# EAGLE board CPC_FOURROM_V1.00 (EAGLE 6.4)
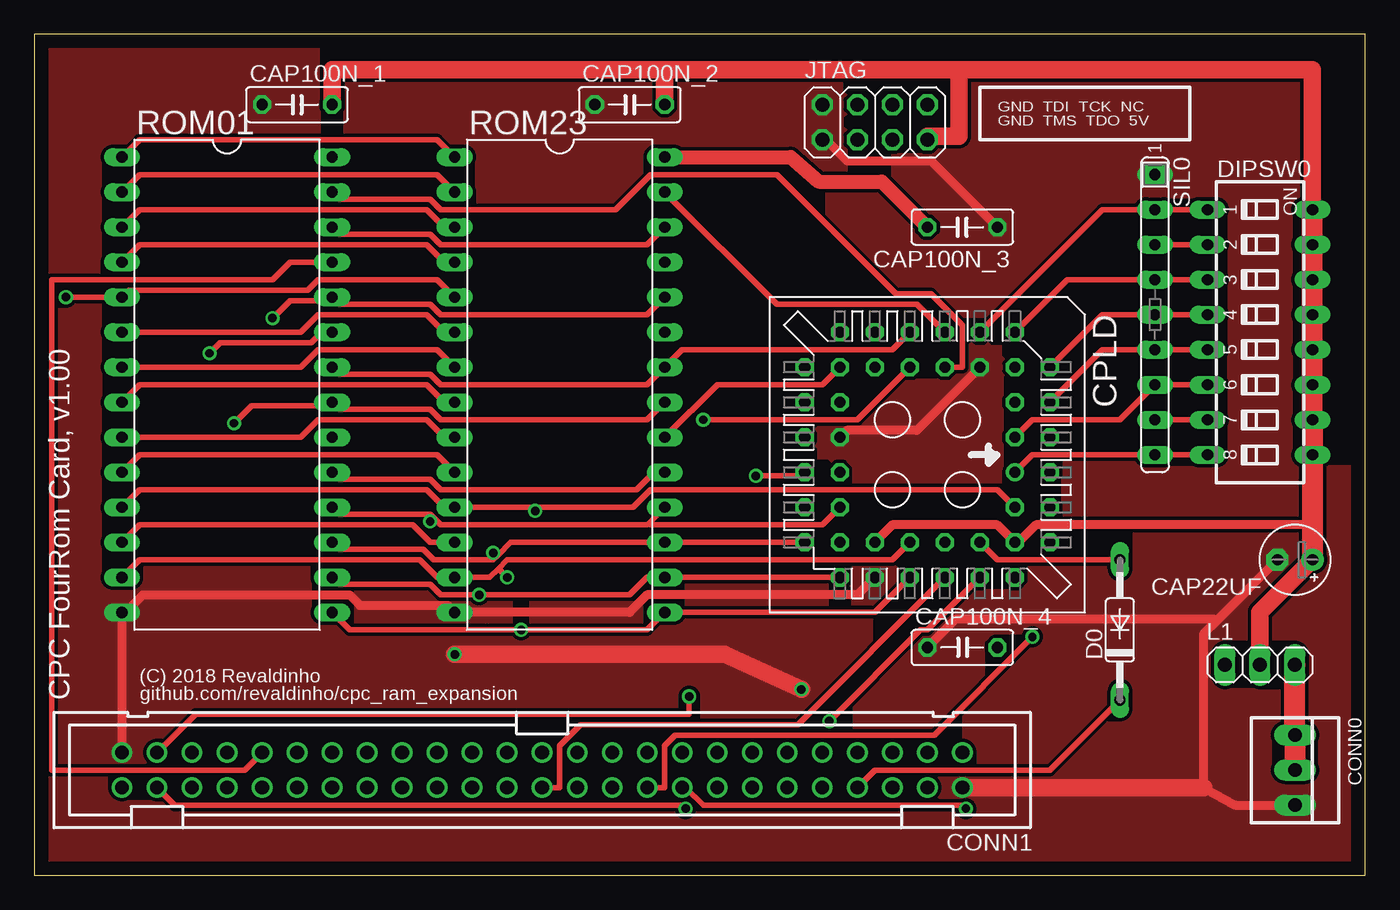
[diagram p0: board, top side]
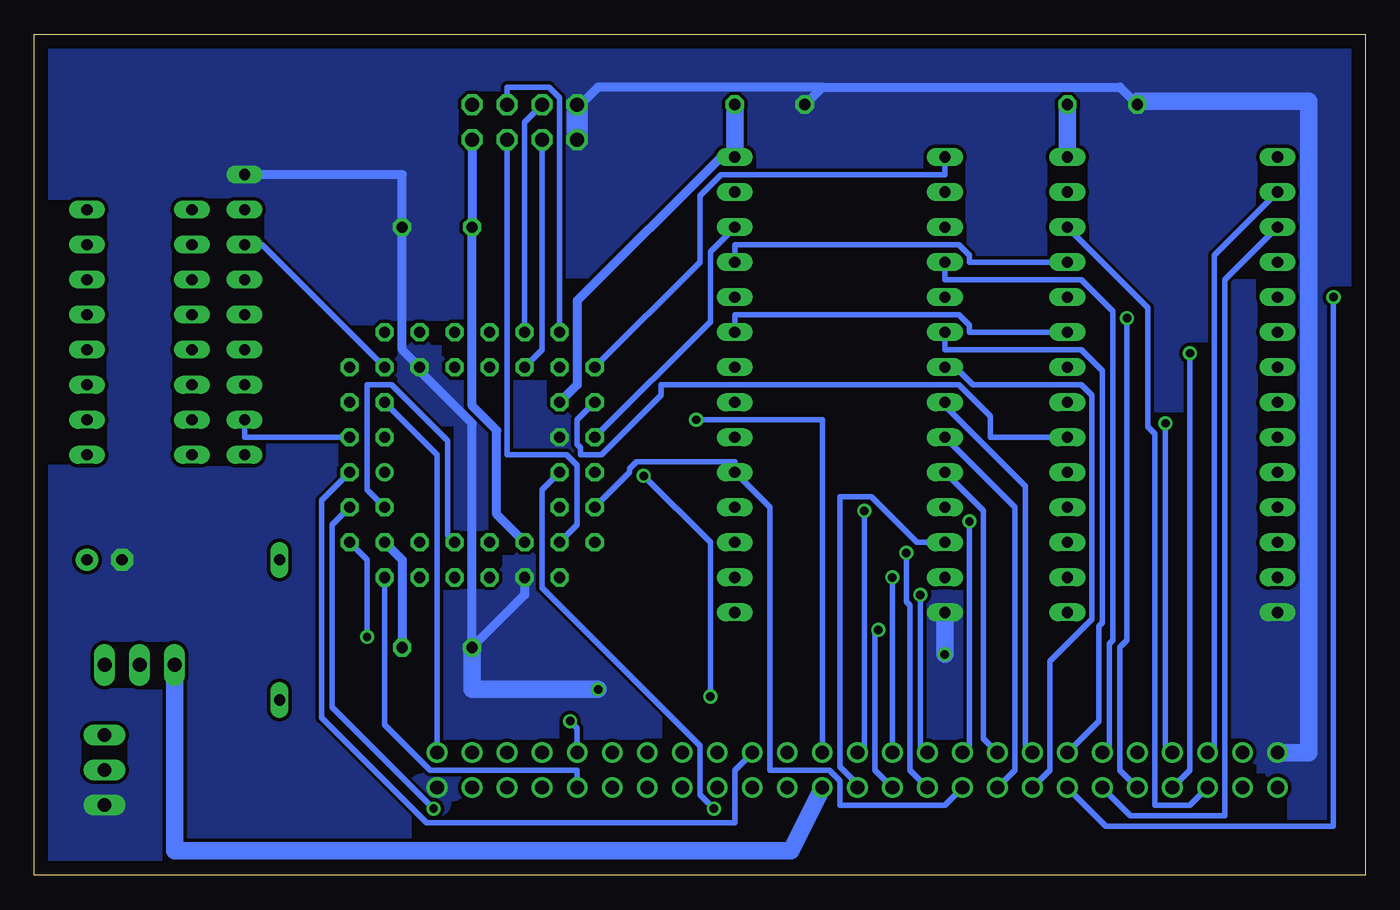
[diagram p1: board, bottom side, seen from below]

Size 96.52 x 60.96 mm. Coordinates in mm from the lower left corner, seen from the top.
Outline: 0,0 96.52,0 96.52,60.96 0,60.96 0,0
Copper layers (1*16): Top 0.035mm / dielectric 1.5mm / Bottom 0.035mm
Design rules "default": minimum track width 10mil, minimum drill 24mil, track to track 8mil, track to pad 8mil, pad to pad 8mil, via to via 8mil, smd to smd 8mil, copper to edge 40mil, drill to drill 8mil, minimum pad ring 10mil, minimum via ring 8mil, stop-mask expansion 4mil, vias tented up to drill 0mil, thermal gap 10mil
Net classes: 0 signal: width 0.381 mm, clearance 0.254 mm; 1 supply: width 0.635 mm, clearance 0.254 mm

## Footprints (pad centres in the part's own frame; a part is rotated, then mirrored left to right if it is on the bottom)
E2,5-5 = drill 0.813 pad 1.6: + -1.27,0 | drill 0.813 pad 1.6 octagon: - 1.27,0
C050-025X075 = drill 0.813 octagon: 1 -2.54,0; 2 2.54,0
22-23-2031 = drill 1 long: 1 -2.54,0; 2 0,0; 3 2.54,0
PAK100/2500-50 = drill 1 pad 1.422: 1 -30.48,-1.27; 2 -30.48,1.27; 3 -27.94,-1.27; 4 -27.94,1.27; 5 -25.4,-1.27; 6 -25.4,1.27; 7 -22.86,-1.27; 8 -22.86,1.27; 9 -20.32,-1.27; 10 -20.32,1.27; 11 -17.78,-1.27; 12 -17.78,1.27; 13 -15.24,-1.27; 14 -15.24,1.27; 15 -12.7,-1.27; 16 -12.7,1.27; 17 -10.16,-1.27; 18 -10.16,1.27; 19 -7.62,-1.27; 20 -7.62,1.27; 21 -5.08,-1.27; 22 -5.08,1.27; 23 -2.54,-1.27; 24 -2.54,1.27; 25 0,-1.27; 26 0,1.27; 27 2.54,-1.27; 28 2.54,1.27; 29 5.08,-1.27; 30 5.08,1.27; 31 7.62,-1.27; 32 7.62,1.27; 33 10.16,-1.27; 34 10.16,1.27; 35 12.7,-1.27; 36 12.7,1.27; 37 15.24,-1.27; 38 15.24,1.27; 39 17.78,-1.27; 40 17.78,1.27; 41 20.32,-1.27; 42 20.32,1.27; 43 22.86,-1.27; 44 22.86,1.27; 45 25.4,-1.27; 46 25.4,1.27; 47 27.94,-1.27; 48 27.94,1.27; 49 30.48,-1.27; 50 30.48,1.27
PLCC-S44-SOCKET = drill 0.813: 1 1.27,6.35 | drill 0.813 octagon: 2 -1.27,8.89; 3 -1.27,6.35; 4 -3.81,8.89; 5 -3.81,6.35; 6 -6.35,8.89; 7 -8.89,6.35; 8 -6.35,6.35; 9 -8.89,3.81; 10 -6.35,3.81; 11 -8.89,1.27; 12 -6.35,1.27; 13 -8.89,-1.27; 14 -6.35,-1.27; 15 -8.89,-3.81; 16 -6.35,-3.81; 17 -8.89,-6.35; 18 -6.35,-8.89; 19 -6.35,-6.35; 20 -3.81,-8.89; 21 -3.81,-6.35; 22 -1.27,-8.89; 23 -1.27,-6.35; 24 1.27,-8.89; 25 1.27,-6.35; 26 3.81,-8.89; 27 3.81,-6.35; 28 6.35,-8.89; 29 8.89,-6.35; 30 6.35,-6.35; 31 8.89,-3.81; 32 6.35,-3.81; 33 8.89,-1.27; 34 6.35,-1.27; 35 8.89,1.27; 36 6.35,1.27; 37 8.89,3.81; 38 6.35,3.81; 39 8.89,6.35; 40 6.35,8.89; 41 6.35,6.35; 42 3.81,8.89; 43 3.81,6.35; 44 1.27,8.89
DO35-10 = drill 0.813 long: A 5.08,0; C -5.08,0
SD4-08 = drill 0.813 long: 1 -8.89,-3.81; 2 -6.35,-3.81; 3 -3.81,-3.81; 4 -1.27,-3.81; 5 1.27,-3.81; 6 3.81,-3.81; 7 6.35,-3.81; 8 8.89,-3.81; 9 8.89,3.81; 10 6.35,3.81; 11 3.81,3.81; 12 1.27,3.81; 13 -1.27,3.81; 14 -3.81,3.81; 15 -6.35,3.81; 16 -8.89,3.81
2X04 = drill 1.016 octagon: 1 -3.81,-1.27; 2 -3.81,1.27; 3 -1.27,-1.27; 4 -1.27,1.27; 5 1.27,-1.27; 6 1.27,1.27; 7 3.81,-1.27; 8 3.81,1.27
1X03 = drill 1.016 long: 1 -2.54,0; 2 0,0; 3 2.54,0
DIL28 = drill 0.813 long: 1 -16.51,-7.62; 2 -13.97,-7.62; 3 -11.43,-7.62; 4 -8.89,-7.62; 5 -6.35,-7.62; 6 -3.81,-7.62; 7 -1.27,-7.62; 8 1.27,-7.62; 9 3.81,-7.62; 10 6.35,-7.62; 11 8.89,-7.62; 12 11.43,-7.62; 13 13.97,-7.62; 14 16.51,-7.62; 15 16.51,7.62; 16 13.97,7.62; 17 11.43,7.62; 18 8.89,7.62; 19 6.35,7.62; 20 3.81,7.62; 21 1.27,7.62; 22 -1.27,7.62; 23 -3.81,7.62; 24 -6.35,7.62; 25 -8.89,7.62; 26 -11.43,7.62; 27 -13.97,7.62; 28 -16.51,7.62
SIL9 = drill 0.813 long: 1 -10.16,0; 2 -7.62,0; 3 -5.08,0; 4 -2.54,0; 5 0,0; 6 2.54,0; 7 5.08,0; 8 7.62,0; 9 10.16,0

## Placement (x,y rotation side)
CAP22UF  [E2,5-5]  91.44,22.86 180 top
CAP100N_1  [C050-025X075]  19.05,55.88 0 top
CAP100N_2  [C050-025X075]  43.18,55.88 0 top
CAP100N_3  [C050-025X075]  67.31,46.99 180 top
CAP100N_4  [C050-025X075]  67.31,16.51 0 top
CONN0  [22-23-2031]  91.44,7.62 270 top
CONN1  [PAK100/2500-50]  36.83,7.62 180 top
CPLD  [PLCC-S44-SOCKET]  64.77,30.48 270 top
D0  [DO35-10]  78.74,17.78 90 top
DIPSW0  [SD4-08]  88.9,39.37 270 top
JTAG  [2X04]  60.96,54.61 0 top
L1  [1X03]  88.9,15.24 0 top
ROM01  [DIL28]  13.97,35.56 270 top
ROM23  [DIL28]  38.1,35.56 270 top
SIL0  [SIL9]  81.28,40.64 270 top

## Library data of the parts
CAP22UF CAP100N_1-CAP100N_4 = resistor
CONN0 = con-molex
CONN1 = con-3m
CPLD ROM01 ROM23 = ic-package
D0 = diode
DIPSW0 = switch-dil
JTAG L1 = pinhead
SIL0 = resistor-sil

## Nets
A0: CONN1.33 ROM01.10 ROM23.10
A1: CONN1.34 ROM01.9 ROM23.9
A2: CONN1.35 ROM01.8 ROM23.8
A3: CONN1.36 ROM01.7 ROM23.7
A4: CONN1.37 ROM01.6 ROM23.6
A5: CONN1.38 ROM01.5 ROM23.5
A6: CONN1.39 ROM01.4 ROM23.4
A7: CONN1.40 ROM01.3 ROM23.3
A8: CONN1.41 ROM01.25 ROM23.25
A9: CONN1.42 ROM01.24 ROM23.24
A10: CONN1.43 ROM01.21 ROM23.21
A11: CONN1.44 ROM01.23 ROM23.23
A12: CONN1.45 ROM01.2 ROM23.2
A13: CONN1.46 CPLD.22 ROM01.26 ROM23.26
A14: CONN1.47 CPLD.24
A15: CONN1.48 CPLD.25
BUSACK_B: CONN1.13
BUSRESET_B: CONN1.11
BUSRQ_B: CONN1.14
CLK: CONN1.1 CPLD.5
CURSOR: CONN1.5
D0: CONN1.25 CPLD.36 CPLD.43 ROM01.11 ROM23.11
D1: CONN1.26 CPLD.35 ROM01.12 ROM23.12
D2: CONN1.27 CPLD.34 ROM01.13 ROM23.13
D3: CONN1.28 CPLD.33 ROM01.15 ROM23.15
D4: CONN1.29 CPLD.29 ROM01.16 ROM23.16
D5: CONN1.30 CPLD.28 ROM01.17 ROM23.17
D6: CONN1.31 CPLD.27 ROM01.18 ROM23.18
D7: CONN1.32 CPLD.26 ROM01.19 ROM23.19
DIP0: CPLD.9 DIPSW0.1 SIL0.2
DIP1: CPLD.8 DIPSW0.2 SIL0.3
DIP2: CPLD.7 DIPSW0.3 SIL0.4
DIP3: CPLD.6 DIPSW0.4 SIL0.5
DIP4: CPLD.4 DIPSW0.5 SIL0.6
DIP5: CPLD.3 DIPSW0.6 SIL0.7
DIP6: CPLD.2 DIPSW0.7 SIL0.8
DIP7: CPLD.1 DIPSW0.8 SIL0.9
EXP_B: CONN1.3
HALT_B: CONN1.17
INT_B: CONN1.16
IOREQ_B: CONN1.20 CPLD.40
LPEN: CONN1.4
M1_B: CONN1.22
MREQ_B: CONN1.23 CPLD.14
NMI_B: CONN1.15
RAMDIS: CONN1.6
RAMRD_B: CONN1.7
RD_B: CONN1.19 CPLD.44
READY: CONN1.12
RESET_B: CONN1.10 CPLD.39
RFSH_B: CONN1.21
ROM01CS_B: CPLD.20 ROM01.20
ROM23CS_B: CPLD.19 ROM23.20
ROMA14: CPLD.18 ROM01.1 ROM23.1
ROMDIS: CONN1.8 D0.C
ROMDIS_PRE: CPLD.38 D0.A
ROMEN_B: CONN1.9 CPLD.37
ROMOE_B: CPLD.13 ROM01.22 ROM23.22
SKT01P27: CPLD.12 ROM01.27
SKT23P27: CPLD.11 ROM23.27
SOUND: CONN1.50
TCK: CPLD.17 JTAG.6
TDI: CPLD.15 JTAG.4
TDO: CPLD.30 JTAG.5
TMS: CPLD.16 JTAG.3
VDD [supply]: CAP22UF.+ CAP100N_1.2 CAP100N_2.2 CAP100N_3.2 CAP100N_4.2 CPLD.21 CPLD.32 CPLD.41 DIPSW0.9 DIPSW0.10 DIPSW0.11 DIPSW0.12 DIPSW0.13 DIPSW0.14 DIPSW0.15 DIPSW0.16 JTAG.7 L1.2 ROM01.28 ROM23.28
VDD_CPC [supply]: CONN1.24 L1.1
VDD_EXT [supply]: CONN0.1 CONN0.2 L1.3
VSS [supply]: CAP22UF.- CAP100N_1.1 CAP100N_2.1 CAP100N_3.1 CAP100N_4.1 CONN0.3 CONN1.2 CONN1.49 CPLD.10 CPLD.23 CPLD.31 JTAG.1 JTAG.2 ROM01.14 ROM23.14 SIL0.1
WR_B: CONN1.18 CPLD.42

## Tracks (layer width: path | path; a pad name or v marks a point on that pad's centre or on a via)
A0
  Top 0.381: ROM01.10 7.62,30.48 29.21,30.48 ROM23.10
  Bottom 0.381: CONN1.33 27.69,9.91 27.69,26.42 ROM23.10
A1
  Top 0.381: ROM01.9 19.3,31.75 20.57,33.02 28.45,33.02 29.72,31.75 ROM23.9
  Bottom 0.381: CONN1.34 25.4,7.62 25.4,26.67 ROM23.9
A2
  Top 0.381: ROM01.8 7.62,35.56 28.45,35.56 29.72,34.29 ROM23.8
  Bottom 0.381: CONN1.35 24.64,9.4 24.64,28.19 30.48,34.04 ROM23.8
A3
  Top 0.381: ROM01.7 19.3,36.83 20.57,38.1 29.21,38.1 ROM23.7
  Bottom 0.381: CONN1.36 22.86,7.62 22.86,15.49 19.81,18.54 19.81,34.8 20.57,35.56 28.45,35.56 29.72,36.83 ROM23.7
A4
  Top 0.381: ROM01.6 19.3,39.37 20.57,40.64 28.45,40.64 29.72,39.37 ROM23.6
  Bottom 0.381: CONN1.37 19.3,11.18 19.3,18.03 19.05,18.29 19.05,36.58 20.57,38.1 30.48,38.1 ROM23.6
A5  (via drill 0.61)
  Top 0.381: ROM23.5 29.21,43.18 20.57,43.18 19.81,42.42 6.86,42.42 ROM01.5 v2.29,41.91
  Bottom 0.381: CONN1.38 18.8,3.56 2.29,3.56 v2.29,41.91
A6
  Top 0.381: ROM01.4 7.62,45.72 28.45,45.72 29.72,44.45 ROM23.4
  Bottom 0.381: CONN1.39 18.54,9.4 18.54,16.76 18.29,17.02 18.29,40.89 20.57,43.18 30.48,43.18 ROM23.4
A7
  Top 0.381: ROM01.3 7.62,48.26 28.45,48.26 29.72,46.99 ROM23.3
  Bottom 0.381: CONN1.40 17.02,4.32 10.16,4.32 10.16,43.18 ROM01.3
A8
  Top 0.381: CONN1.41 15.24,7.62 1.27,7.62 1.27,43.18 17.27,43.18 18.54,44.45 ROM01.25
  Bottom 0.381: ROM01.25 28.7,44.45 28.7,44.96 29.46,45.72 45.72,45.72 ROM23.25
A9  (via drill 0.61)
  Top 0.381: ROM23.24 44.45,40.64 29.46,40.64 28.7,41.4 22.1,41.4 ROM01.24 21.59,41.66 18.54,41.66 v17.27,40.39
  Bottom 0.381: CONN1.42 17.78,7.62 17.78,16.51 17.27,17.02 v17.27,40.39
A10  (via drill 0.61)
  Top 0.381: ROM23.21 44.45,33.02 29.46,33.02 28.7,33.78 22.1,33.78 ROM01.21 21.59,34.04 15.75,34.04 v14.48,32.77
  Bottom 0.381: CONN1.43 14.48,9.4 v14.48,32.77
A11  (via drill 0.61)
  Top 0.381: v12.7,37.85 13.46,38.61 20.07,38.61 20.83,39.37 ROM01.23
  Bottom 0.381: ROM01.23 28.7,39.37 28.7,39.88 29.46,40.64 45.72,40.64 ROM23.23 | CONN1.44 12.7,7.62 v12.7,37.85
A12
  Top 0.381: ROM01.2 7.62,50.8 29.21,50.8 ROM23.2
  Bottom 0.381: CONN1.45 10.92,9.4 10.92,44.96 ROM01.2
A13
  Top 0.381: ROM01.26 22.1,46.48 28.7,46.48 29.46,45.72 44.45,45.72 ROM23.26
  Bottom 0.381: CPLD.22 47.5,40.13 47.5,45.21 ROM23.26 | CONN1.46 12.7,5.08 15.24,5.08 15.24,32 15.75,32.51 15.75,41.15 ROM01.26
A14  (via drill 0.61)
  Top 0.381: CPLD.24 55.63,28.96 v52.32,28.96 | v47.5,12.95 47.5,11.68 11.68,11.68 CONN1.47
  Bottom 0.381: v52.32,28.96 47.5,24.13 v47.5,12.95
A15  (via drill 0.61)
  Top 0.381: v47.24,4.83 46.99,5.08 10.16,5.08 CONN1.48
  Bottom 0.381: CPLD.25 59.69,27.94 59.69,20.83 48.26,9.4 48.26,5.84 v47.24,4.83
CLK
  Bottom 0.381: CPLD.5 67.31,30.48 CONN1.1
D0  (via drill 0.61)
  Top 0.381: ROM01.11 7.62,27.94 28.45,27.94 29.72,26.67 ROM23.11 36.07,26.67 v36.32,26.42 36.32,26.67 43.43,26.67 44.7,27.94 69.85,27.94 CPLD.43
  Bottom 0.381: CPLD.36 66.55,24.64 66.55,31.5 70.61,35.56 72.39,35.56 72.39,27.94 CPLD.43 | CONN1.25 36.32,9.4 v36.32,26.42
D1
  Top 0.381: ROM01.12 7.62,25.4 27.43,25.4 28.7,24.13 ROM23.12 | CPLD.35 55.37,10.92 39.62,10.92 38.1,9.4 38.1,6.35 CONN1.26
  Bottom 0.381: ROM23.12 32.51,24.13 35.81,27.43 38.1,27.43 38.1,7.87 36.83,6.6 CONN1.26
D2  (via drill 0.61)
  Top 0.381: ROM01.13 7.62,22.86 27.94,22.86 29.21,21.59 ROM23.13 33.02,21.59 33.66,22.23 | CPLD.34 62.23,22.86 34.29,22.86 33.66,22.23 | 33.66,22.23 v34.29,21.59
  Bottom 0.381: v34.29,21.59 CONN1.27
D3  (via drill 0.61)
  Top 0.381: ROM01.15 22.86,17.78 v35.31,17.78 44.45,17.78 ROM23.15 60.96,19.05 CPLD.33
  Bottom 0.381: CONN1.28 35.56,7.62 35.56,17.53 v35.31,17.78
D4  (via drill 0.61)
  Top 0.381: ROM01.16 22.1,21.08 28.7,21.08 29.46,20.32 v32.26,20.32 43.18,20.32 44.45,21.59 ROM23.16 CPLD.29
  Bottom 0.381: CONN1.29 32.26,9.4 v32.26,20.32
D5  (via drill 0.61)
  Top 0.381: ROM01.17 22.1,23.62 28.19,23.62 28.96,22.86 33.27,22.86 33.66,23.24 | 33.66,23.24 34.54,24.13 ROM23.17 CPLD.28 | v33.27,23.37 33.53,23.37 33.66,23.24
  Bottom 0.381: CONN1.30 33.02,7.62 33.02,19.56 33.27,19.81 v33.27,23.37
D6  (via drill 0.61)
  Top 0.381: ROM01.18 22.1,26.16 28.7,26.16 28.83,26.04 | 28.83,26.04 29.46,25.4 44.45,25.4 44.58,25.53 | ROM23.18 44.58,25.53 | CPLD.27 57.15,25.4 44.7,25.4 44.58,25.53 | v28.7,25.65 28.7,25.91 28.83,26.04
  Bottom 0.381: CONN1.31 28.7,9.4 v28.7,25.65
D7
  Top 0.381: ROM01.19 22.1,28.7 28.7,28.7 29.46,27.94 43.69,27.94 44.96,29.21 ROM23.19
  Bottom 0.381: CPLD.26 53.34,29.21 53.34,29.46 52.83,29.97 45.72,29.97 ROM23.19 43.18,26.67 43.18,7.62 38.86,7.62 38.1,6.86 38.1,5.08 30.48,5.08 CONN1.32
DIP0
  Top 0.381: CPLD.9 77.47,48.26 SIL0.2 DIPSW0.1
DIP1
  Top 0.381: SIL0.3 DIPSW0.2
  Bottom 0.381: CPLD.8 80.01,45.72 SIL0.3
DIP2
  Top 0.381: CPLD.7 74.93,43.18 SIL0.4 DIPSW0.3
DIP3
  Top 0.381: CPLD.6 77.47,40.64 SIL0.5 DIPSW0.4
DIP4
  Top 0.381: CPLD.4 77.47,38.1 SIL0.6 DIPSW0.5
DIP5
  Top 0.381: CPLD.3 72.39,33.02 78.74,33.02 SIL0.7 DIPSW0.6
DIP6
  Top 0.381: SIL0.8 DIPSW0.7
  Bottom 0.381: CPLD.2 81.28,31.75 SIL0.8
DIP7
  Top 0.381: CPLD.1 72.39,30.48 SIL0.9 DIPSW0.8
IOREQ_B  (via drill 0.61)
  Top 0.381: v72.39,17.27 65.28,10.16 46.48,10.16 45.72,9.4 45.72,6.35 CONN1.20
  Bottom 0.381: CPLD.40 72.39,22.86 v72.39,17.27
MREQ_B  (via drill 0.61)
  Top 0.381: CPLD.14 59.69,33.02 v48.51,33.02
  Bottom 0.381: v48.51,33.02 39.37,33.02 CONN1.23
RD_B
  Bottom 0.381: CPLD.44 75.69,27.18 75.69,11.43 68.07,3.81 45.72,3.81 45.72,7.62 CONN1.19
RESET_B
  Bottom 0.381: CPLD.39 71.12,10.92 67.82,7.62 57.15,7.62 CONN1.10
ROM01CS_B
  Bottom 0.381: ROM01.20 27.18,31.75 27.18,33.27 29.46,35.56 51.05,35.56 51.05,34.8 55.37,30.48 56.9,30.48 56.9,30.99 57.15,31.24 57.15,33.02 CPLD.20
ROM23CS_B
  Top 0.381: ROM23.20 49.53,35.56 57.15,35.56 CPLD.19
ROMA14
  Top 0.381: ROM01.1 7.62,53.34 29.21,53.34 ROM23.1
  Bottom 0.381: CPLD.18 48.26,44.45 48.26,49.28 46.74,50.8 30.48,50.8 ROM23.1
ROMDIS
  Top 0.381: D0.C 73.66,7.62 60.96,7.62 CONN1.8
ROMDIS_PRE
  Top 0.381: CPLD.38 69.85,22.86 D0.A
ROMEN_B  (via drill 0.61)
  Top 0.381: CPLD.37 64.77,17.78 64.26,17.78 v57.66,11.18
  Bottom 0.381: v57.66,11.18 57.15,10.67 CONN1.9
ROMOE_B
  Top 0.381: ROM01.22 22.1,36.32 28.7,36.32 29.46,35.56 44.45,35.56 ROM23.22 46.99,38.1 62.23,38.1 CPLD.13
SKT01P27
  Top 0.381: ROM01.27 22.1,49.02 28.7,49.02 29.46,48.26 42.16,48.26 44.7,50.8 53.85,50.8 62.48,42.16 65.02,42.16 67.31,39.88 67.31,36.83 CPLD.12
SKT23P27
  Top 0.381: ROM23.27 53.85,41.4 64.01,41.4 CPLD.11
TCK
  Bottom 0.381: CPLD.17 58.42,56.39 59.18,57.15 62.23,57.15 JTAG.6
TDI
  Bottom 0.381: CPLD.15 60.96,54.61 JTAG.4
TDO
  Bottom 0.381: CPLD.30 57.15,25.4 57.15,29.72 57.91,30.48 62.23,30.48 JTAG.5
TMS
  Bottom 0.381: CPLD.16 59.69,38.1 JTAG.3
VDD
  Top 0.635: CPLD.32 62.23,25.4 69.85,25.4 CPLD.41 71.37,24.13 72.64,25.4 92.71,25.4 | JTAG.7 64.77,53.59
  Top 1.016: CAP100N_3.2 61.47,50.29 56.9,50.29 54.86,52.07 ROM23.28
  Top 1.27: L1.2 88.9,19.05 CAP22UF.+ | CAP100N_1.2 21.59,58.42 92.71,58.42 DIPSW0.16 | CAP100N_2.2 45.72,58.17 | 64.77,53.59 67.06,53.59 67.06,58.17
  Top 1.524: DIPSW0.16 DIPSW0.15 DIPSW0.14 DIPSW0.13 DIPSW0.12 DIPSW0.11 DIPSW0.10 DIPSW0.9 92.71,25.4 CAP22UF.+
  Bottom 0.635: JTAG.7 CAP100N_3.2 64.77,34.04 62.99,32.26 62.99,26.16 CPLD.32 | CPLD.21 57.15,35.56 57.15,41.66 46.74,52.07 ROM23.28 | CAP100N_4.2 69.85,22.86 CPLD.41
  Bottom 1.27: CAP100N_1.2 ROM01.28 | ROM23.28 CAP100N_2.2
VDD_CPC
  Bottom 1.27: CONN1.24 41.66,1.78 86.36,1.78 L1.1
VDD_EXT
  Top 1.524: CONN0.2 CONN0.1 L1.3
VSS  (via drill 0.61)
  Top 0.635: CPLD.23 58.93,32.26 64.01,32.26 CPLD.10 | CAP100N_3.1 65.02,51.82 58.93,51.82 57.4,53.34 JTAG.1 | CONN1.49 ROM01.14 6.6,19.05 7.87,20.32 22.86,20.32 23.62,19.56 29.97,19.56 ROM23.14 43.18,19.05 44.45,20.32 59.69,20.32 CPLD.31 | CONN0.3 87.12,5.08 84.84,6.35 84.84,17.53 85.72,18.41 | CONN1.2 67.56,6.35 | 85.72,18.41 CAP22UF.- | CAP100N_4.1 66.8,18.54 85.6,18.54 85.72,18.41
  Top 1.27: 67.56,6.35 84.84,6.35 | v55.63,13.46 50.04,16 v30.48,16
  Bottom 0.635: SIL0.1 69.85,50.8 CAP100N_3.1 69.85,38.1 CPLD.10 68.58,36.58 64.77,32.77 CAP100N_4.1 60.96,20.32 CPLD.31 | CAP100N_1.1 17.78,57.15 39.37,57.15 | CAP100N_2.1 39.37,57.15 | 39.37,57.15 55.63,57.15 56.9,55.88 JTAG.2
  Bottom 1.27: CONN1.49 4.06,8.89 4.06,56.13 16.51,56.13 CAP100N_1.1 | CAP100N_4.1 64.77,13.46 v55.63,13.46 | v30.48,16 30.48,18.8
  Bottom 1.524: JTAG.2 JTAG.1
  pour Top: 0,0 0,60.96 96.52,60.96 96.52,0
  pour Bottom: 0,0 0,60.96 96.52,60.96 96.52,0
WR_B  (via drill 0.61)
  Top 0.381: v67.56,4.83 67.31,5.08 48.51,5.08 47.24,6.35 CONN1.18
  Bottom 0.381: CPLD.42 74.93,25.4 74.93,12.19 v67.56,4.83

## Text on the board
tPlace: GND TDI TCK NC | GND TMS TDO 5V | (C) 2018 Revaldinho | CPC FourRom Card, v1.00 | github.com/revaldinho/cpc_ram_expansion